# Altium PCB canhbaochayrung.PcbDoc
Units mm, origin at the board's own origin, x right, y up, seen from the top; angles counter-clockwise.
Board outline 38 x 38 mm, 4 copper layers (Top Layer, Internal Plane 1, Internal Plane 2, Bottom Layer); 30 components, 32 nets, 152 pads, 15 vias.
Unrouted connection lines stored in the file: 20.
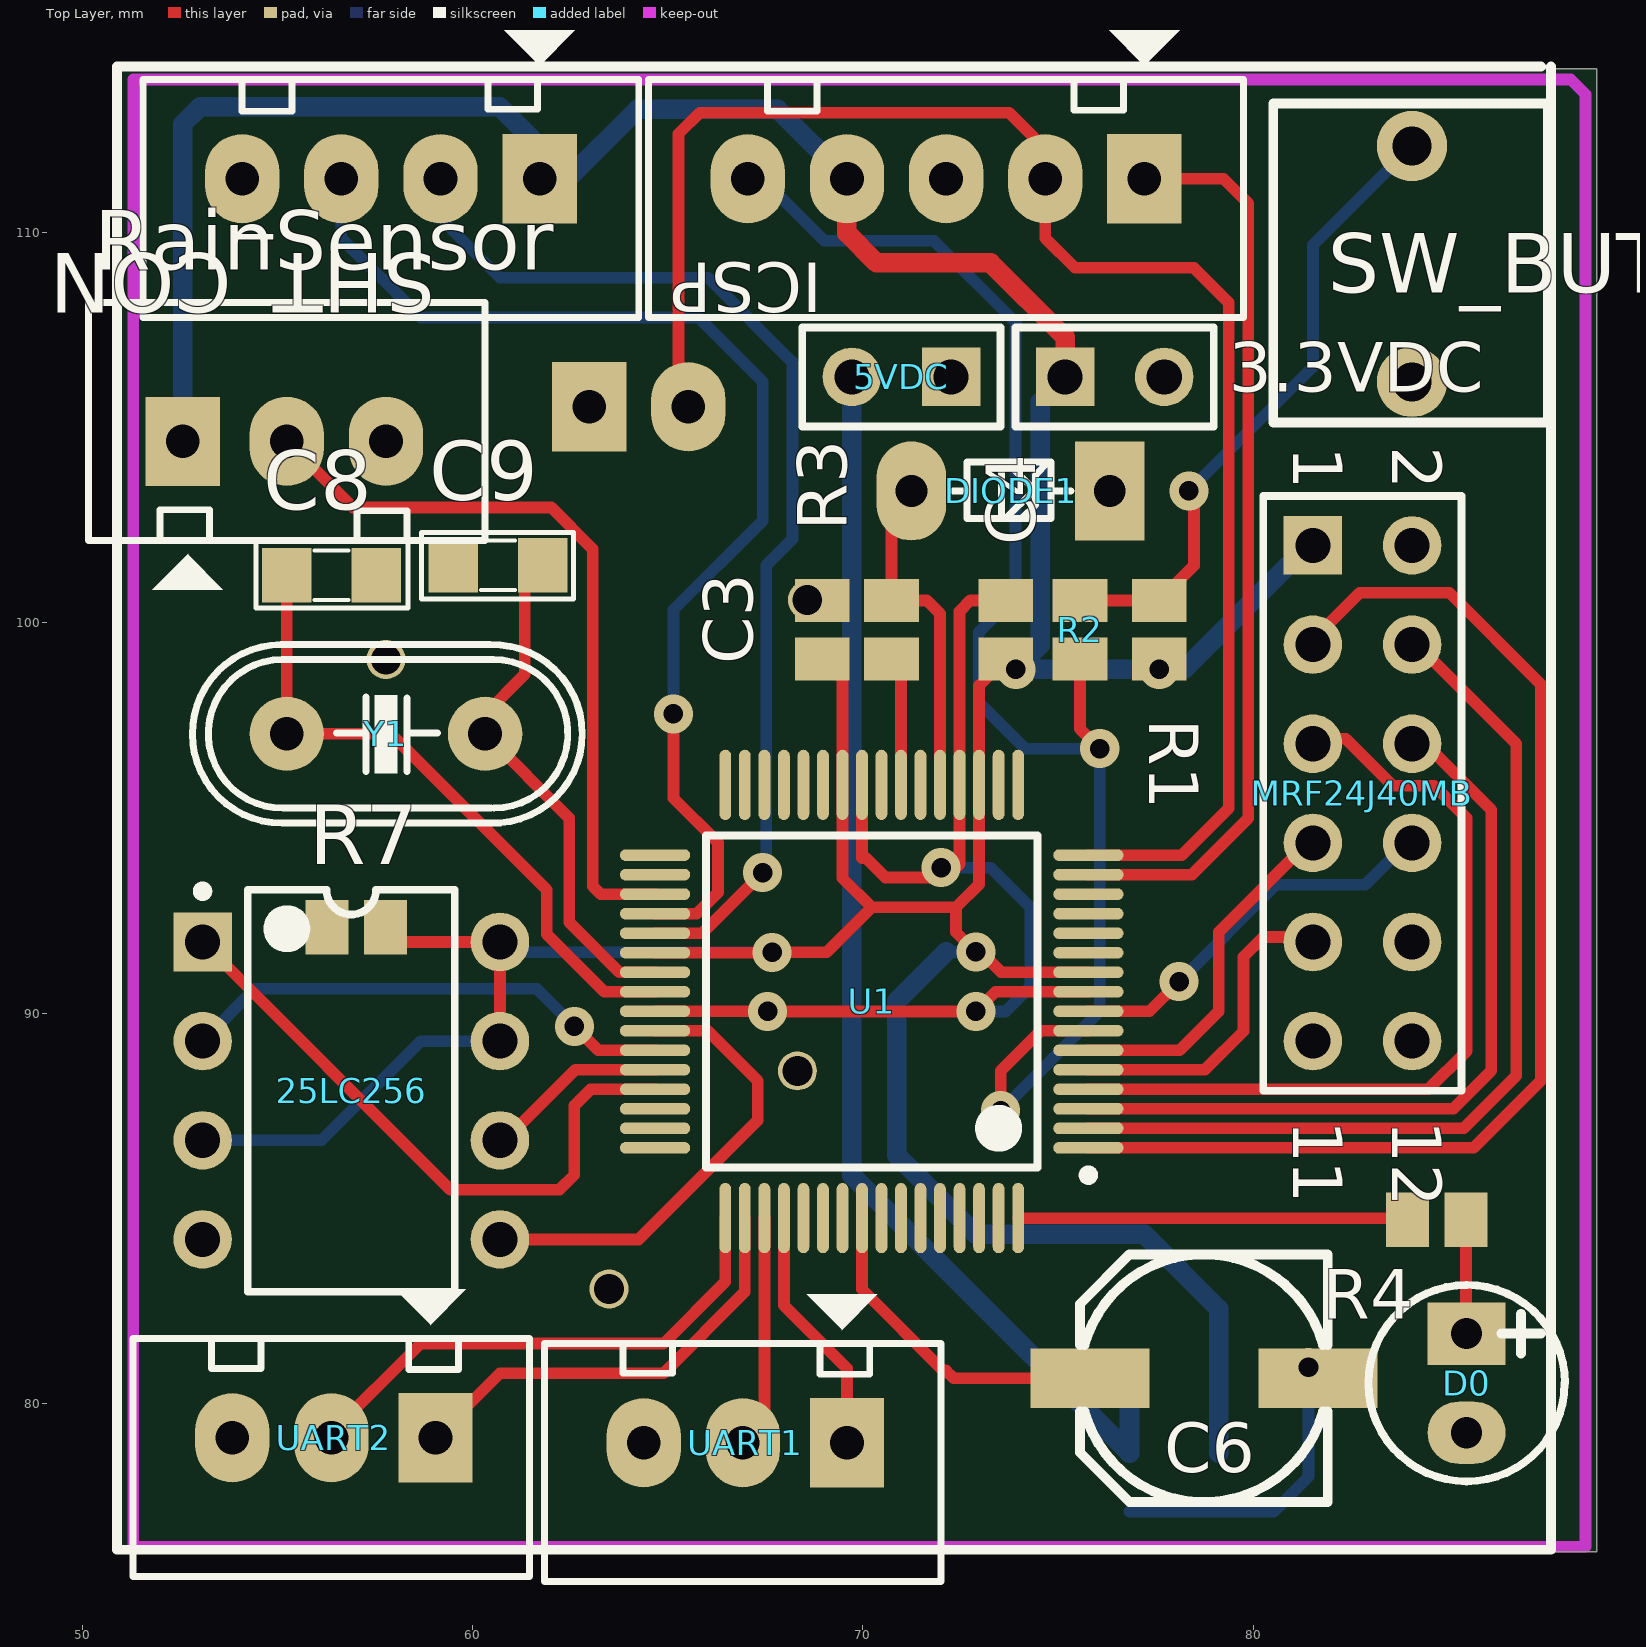
[diagram p0: Top Layer view]
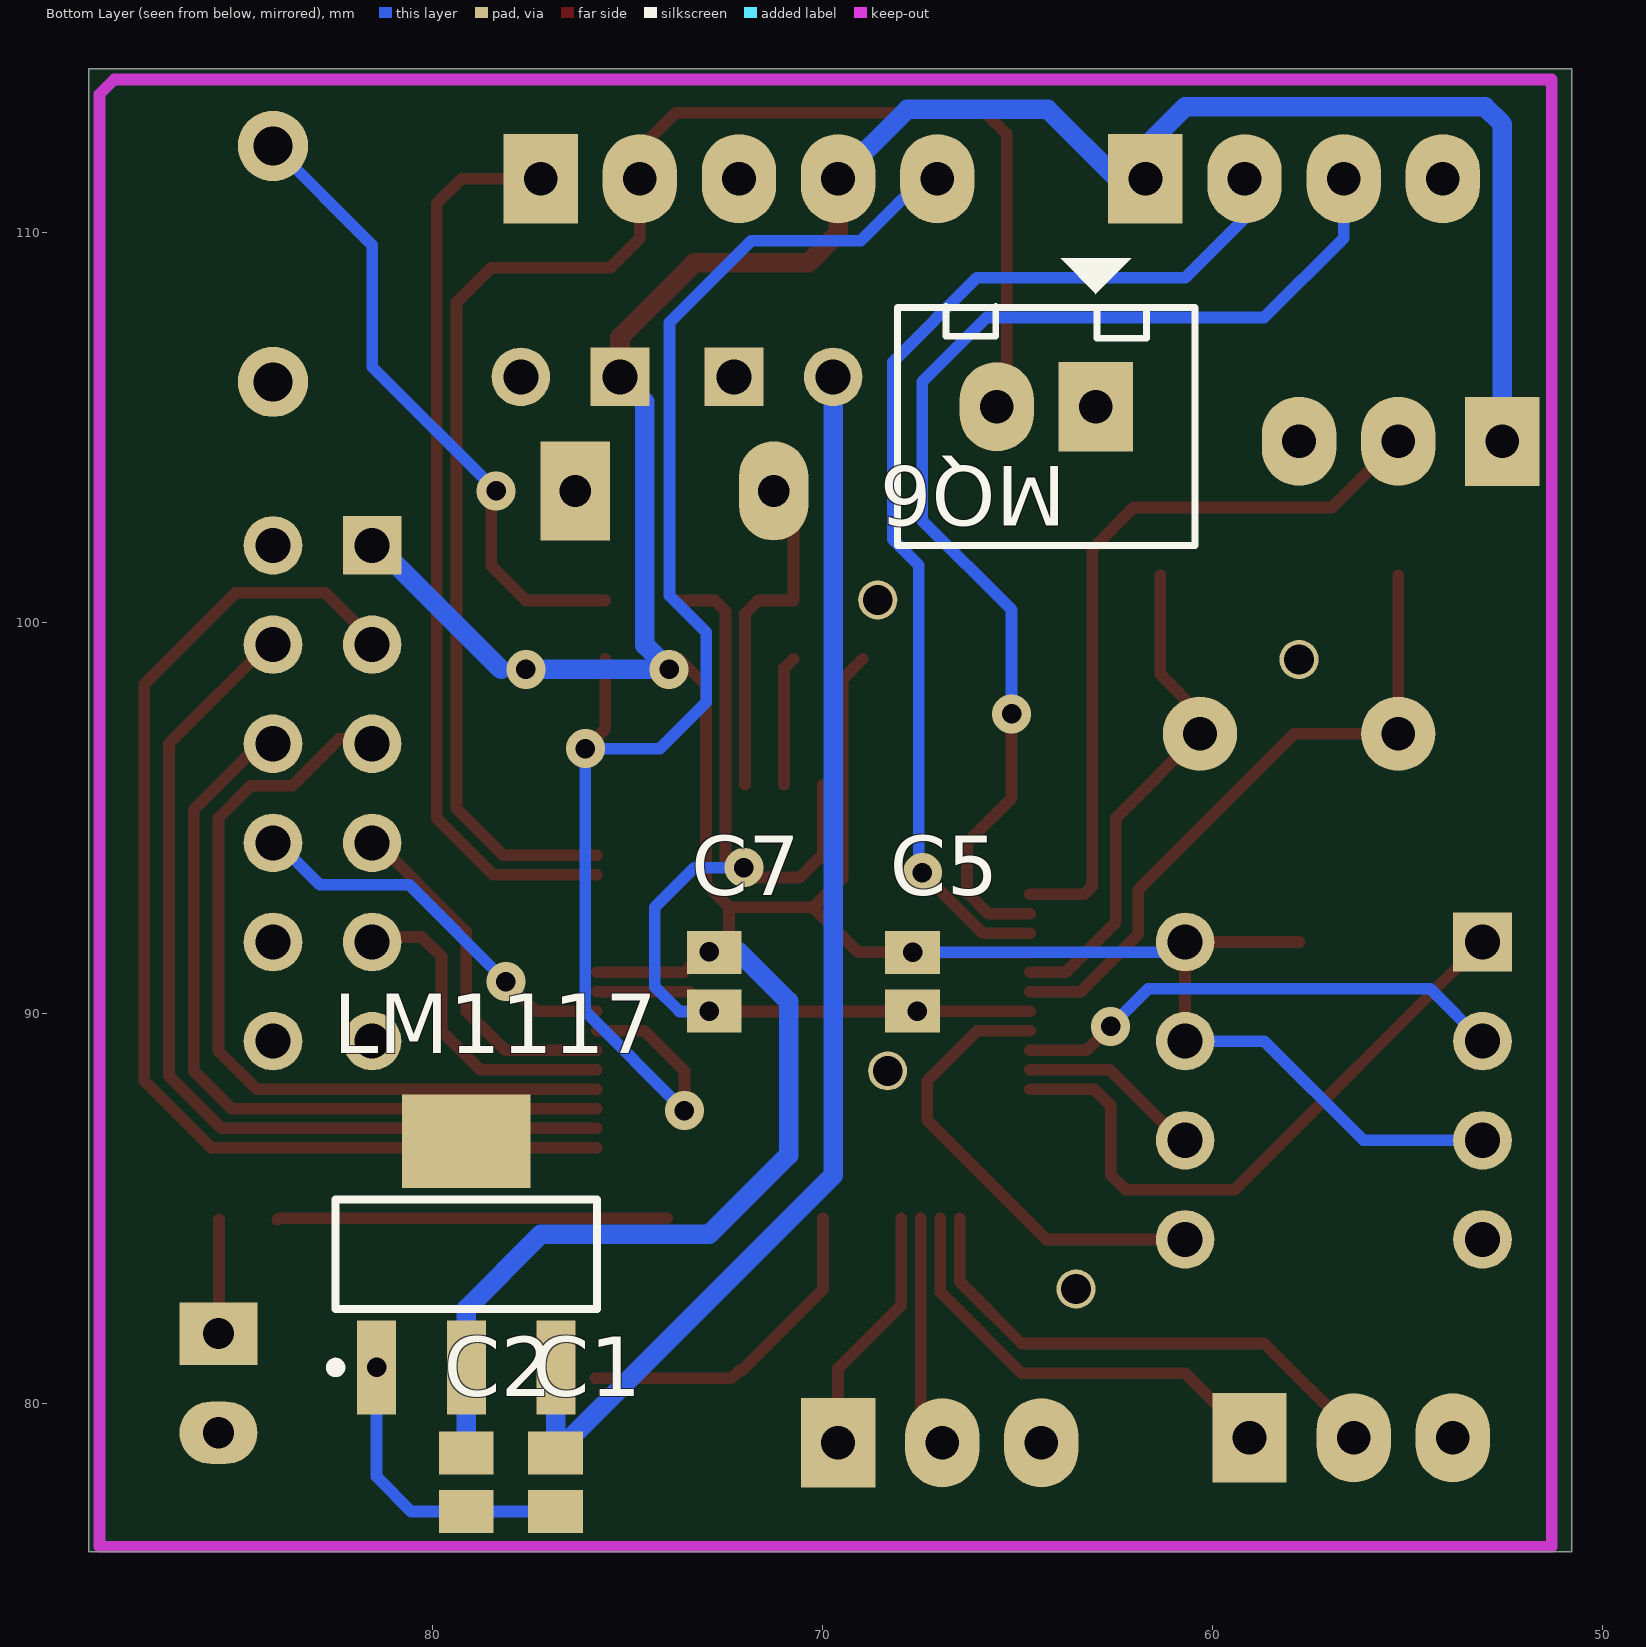
[diagram p1: Bottom Layer view, seen from below]
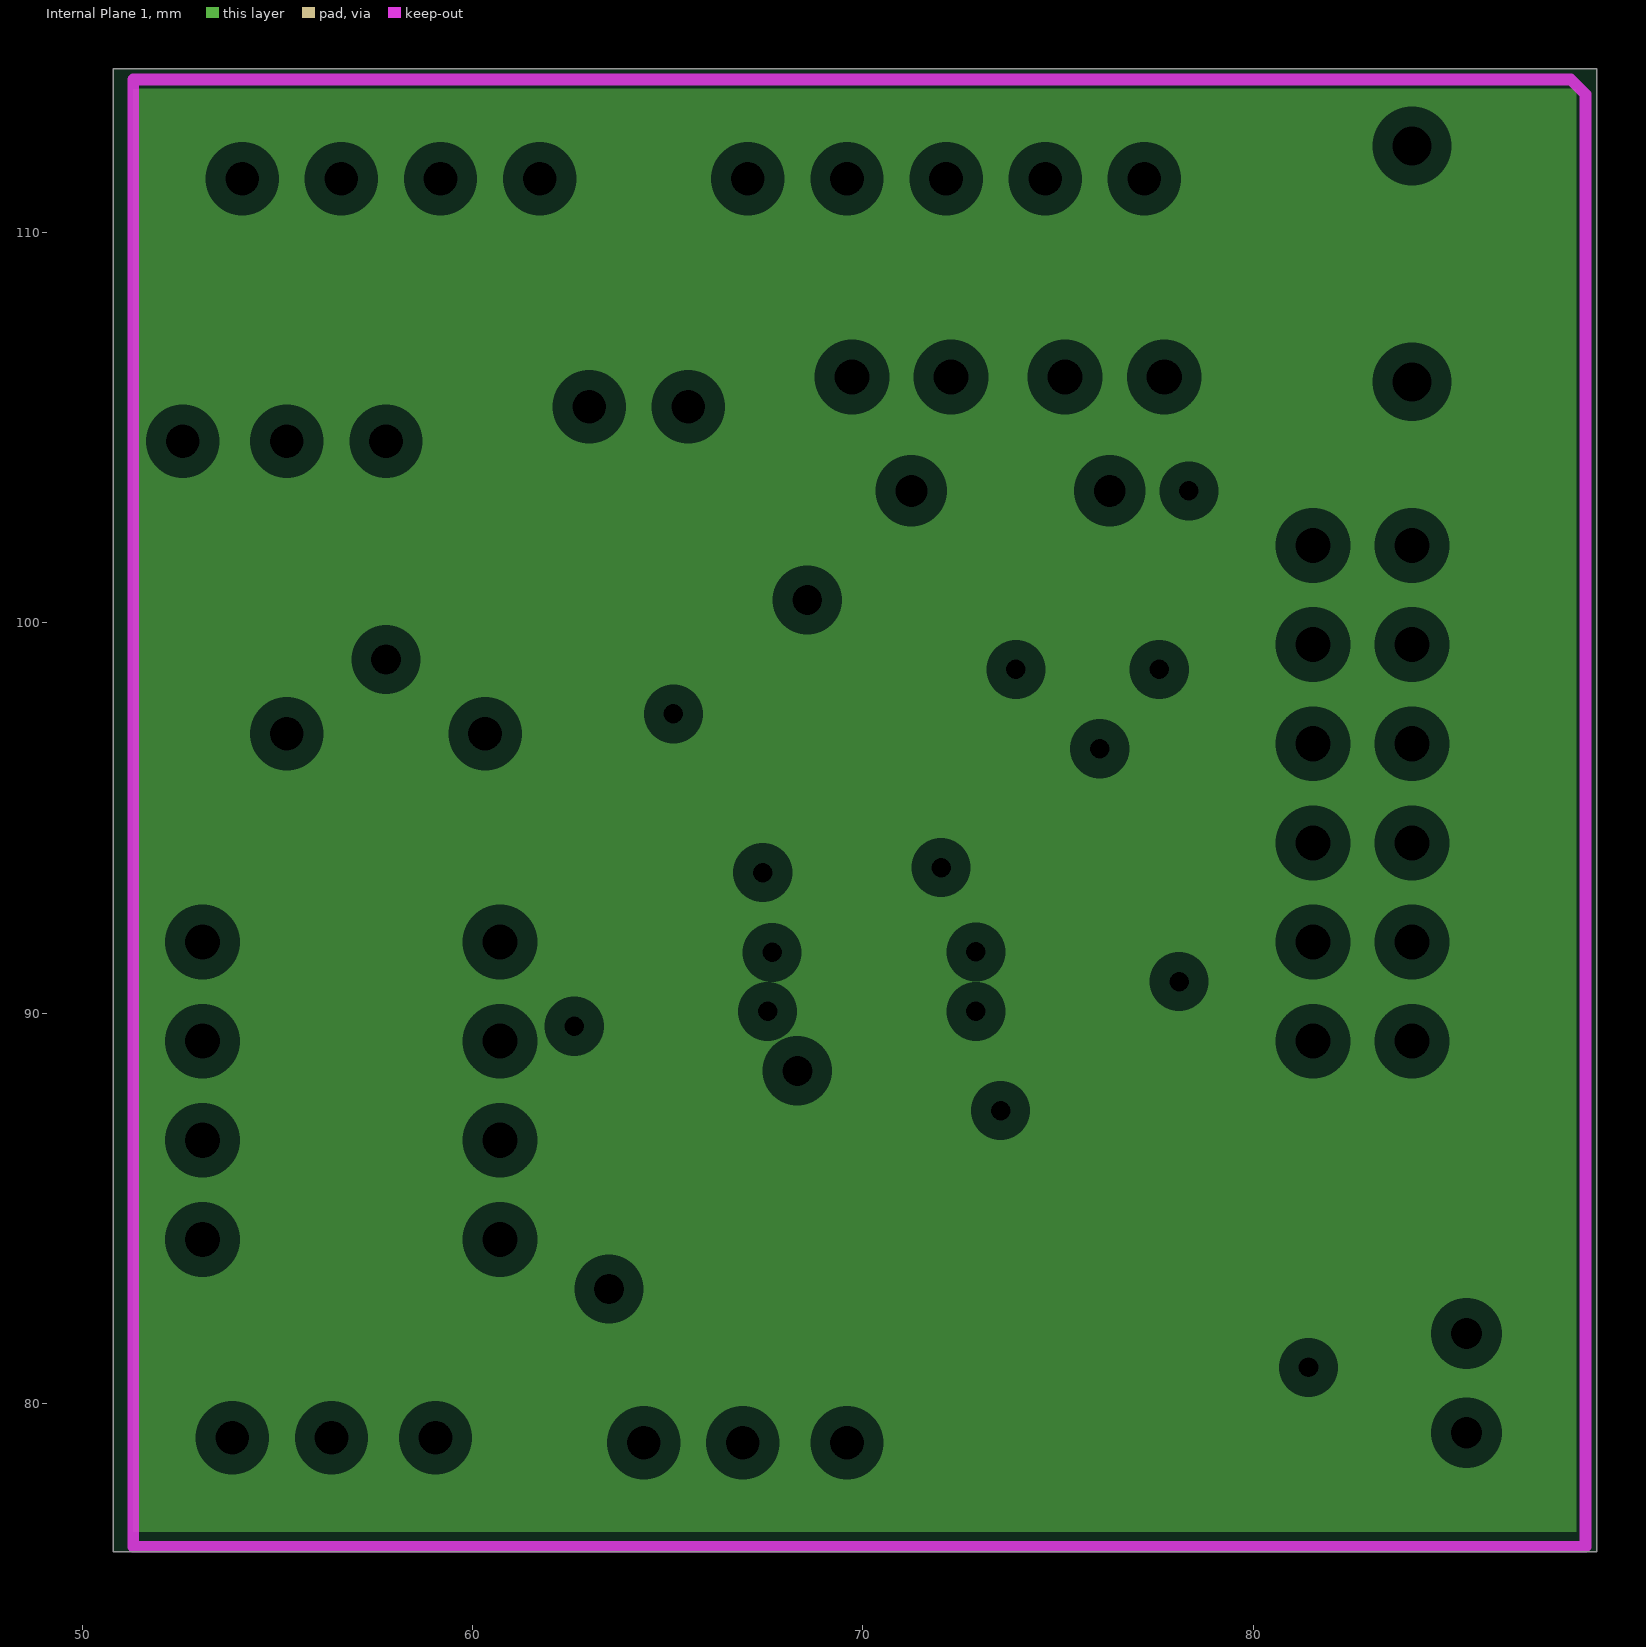
[diagram p2: Internal Plane 1, clearances drawn from the general rule]
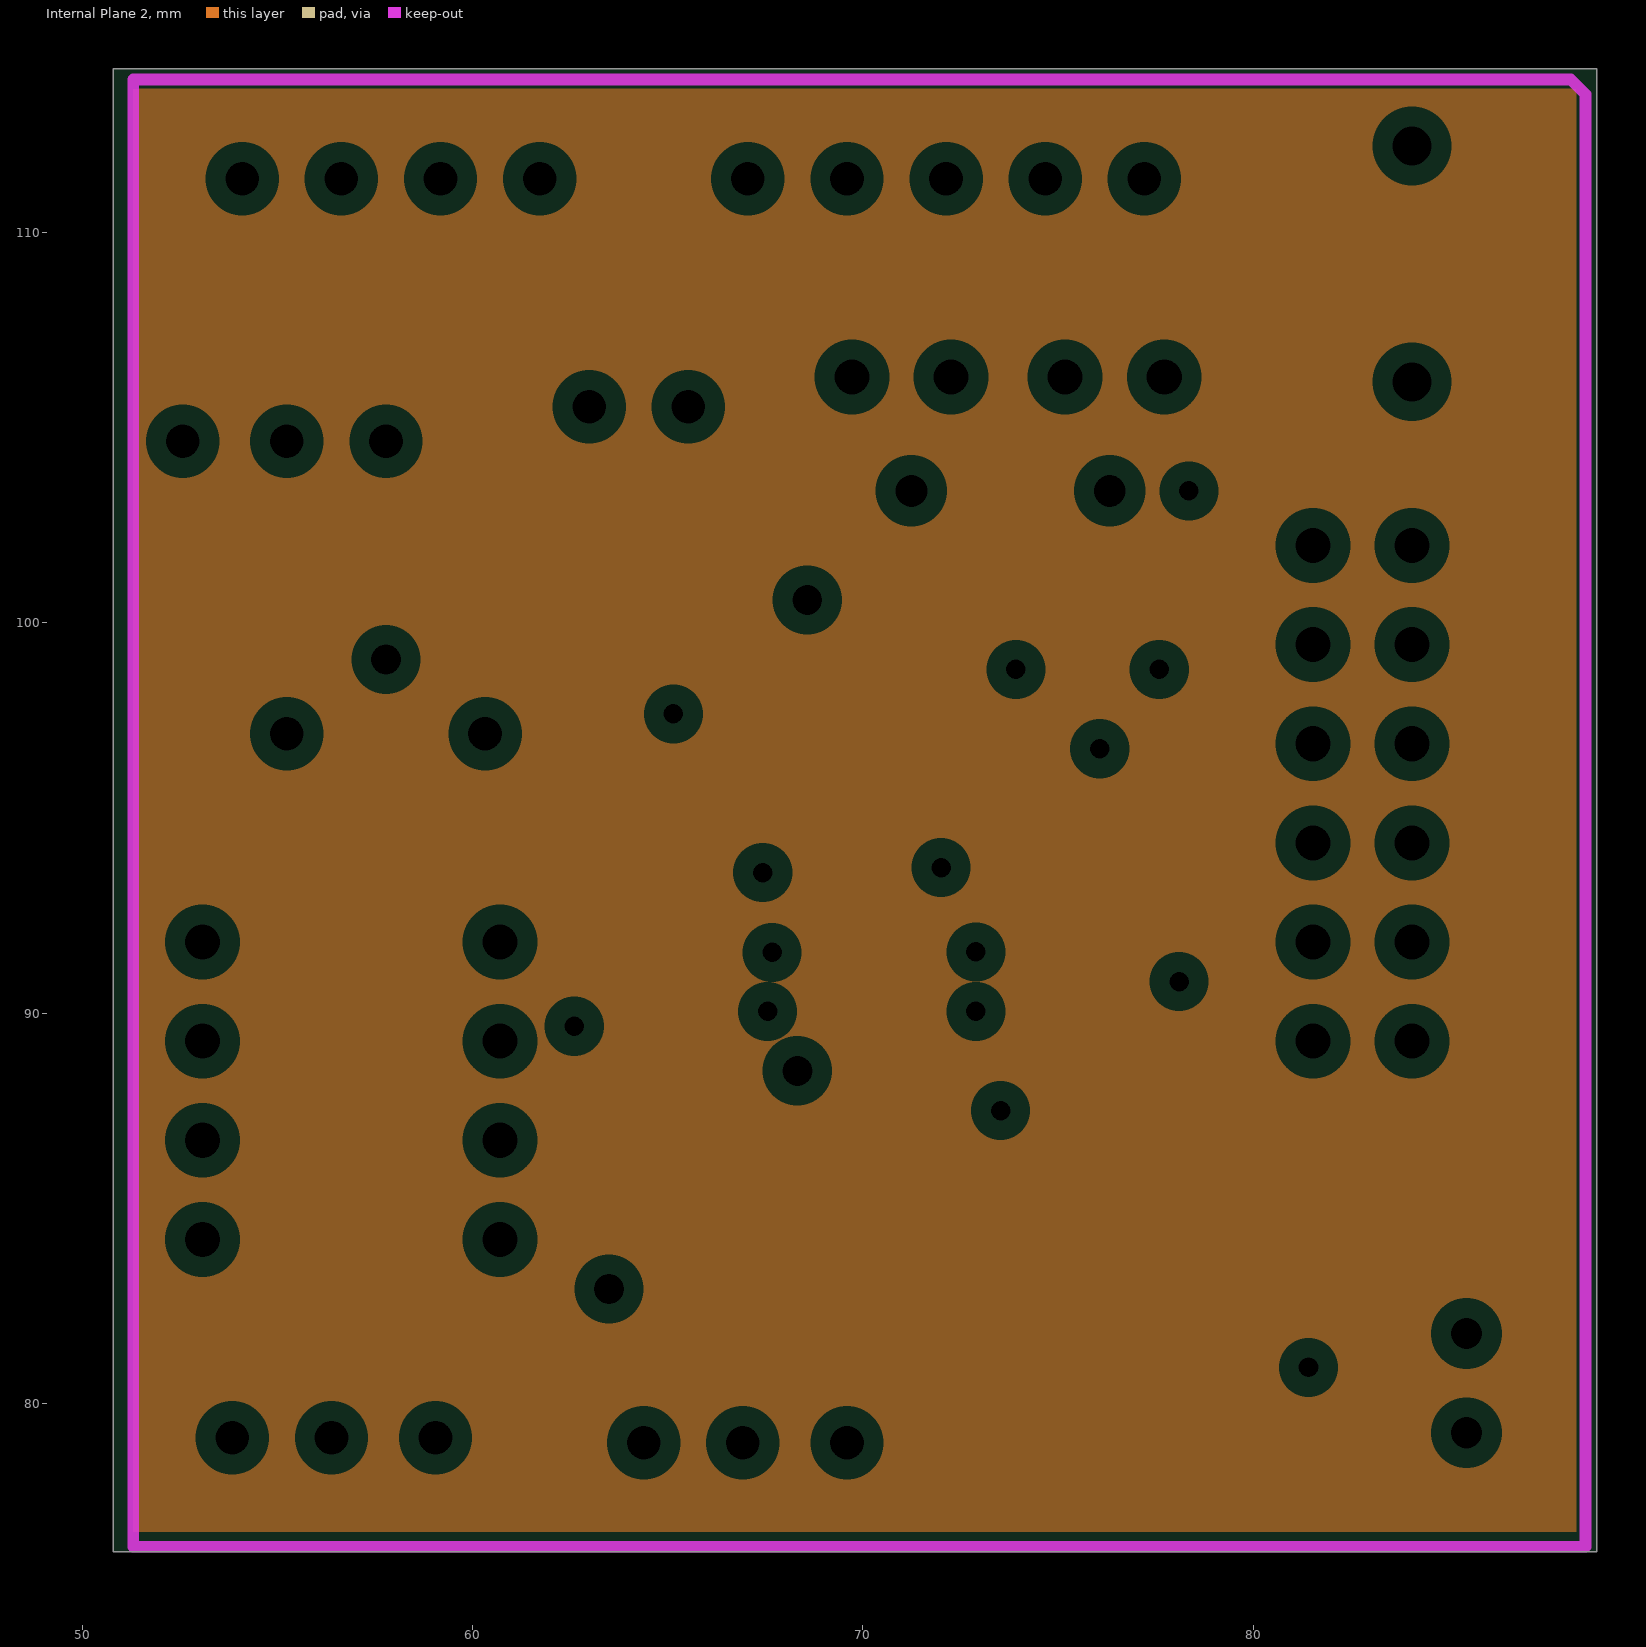
[diagram p3: Internal Plane 2, clearances drawn from the general rule]

## Layer stack, top to bottom
Top Layer: signal copper 0.0356
Dielectric: dielectric 0.32, FR-4, Dk 4.8
Internal Plane 1: plane copper 0.0356
Dielectric: dielectric 0.32, FR-4, Dk 4.8
Internal Plane 2: plane copper 0.0356
Dielectric: dielectric 0.32, FR-4, Dk 4.8
Bottom Layer: signal copper 0.0356

## Board outline
50.8,76.2 88.8,76.2 88.8,114.2 50.8,114.2

## Design rules (kind name [scope] priority, off if disabled: settings)
Clearance [All] p1: gap=0.4
PlaneClearance [All] p1: clearance=0.508
PlaneConnect [All] p1: planeconnectstyle=Relief reliefexpansion=0.508 reliefentries=4 reliefconductorwidth=0.254 reliefairgap=0.254
PolygonConnect [All] p1: connectstyle=Relief reliefconductorwidth=0.254 reliefentries=4 polygonreliefangle="90 Angle"
RoomDefinition Canhbaochayrung [InComponentClass('Canhbaochayrung')] p1: confinementstyle=ConfineIn formatcopy=TRUE lockcomponents=FALSE outline 0,0 50.8,0 50.8,25.4 0,25.4
RoutingVias [All] p1: holewidth=0.6 width=1 viastyle="Through Hole" minholewidth=0.5 minwidth=1 maxholewidth=1 maxwidth=1.27
SilkscreenOverComponentPads [All] p1: minsilkscreentomaskgap=0.254
SolderMaskExpansion [All] p1: expansion=0.102
Width [All] p1: maxlimit=0.3 minlimit=0.3 preferedwidth=0.3
25 further rules are at their usual default settings.

## Components (designator, comment, footprint, x,y, rotation, side; value= is the part's Value field where it differs from the comment)
3.3VDC "Header 2" HDR1X2 75.184,106.299 r0 top
5VDC "Header 2" HDR1X2 72.263,106.299 r180 top
25LC256 "25LC256" DIP-8 56.896,88.011 r0 top
C1 "Cap" C0805 76.835,77.978 r90 bottom
C2 "Cap" C0805 79.121,77.978 r90 bottom
C3 "Cap" C0805 68.961,99.822 r90 top
C4 "Cap" C0805 73.66,99.822 r270 top
C5 "Cap" C0805 67.691,90.805 r270 bottom
C6 "Cap2" "CAP P 6.3x5.4" 78.74,80.645 r180 top
C7 "Cap" C0805 72.771,90.805 r270 bottom
C8 "Cap" SM-0805 56.388,101.219 r180 top
C9 "Cap" SM-0805 60.655,101.473 r0 top
D0 "LED nguon" LED3mm 85.471,80.518 r270 top
DIODE1 "Diode" DZ0.5A 71.247,103.378 r180 top
ICSP "ICSP" CON5 77.216,111.379 r180 top
LM1117 "LM317" SOT223-4N 79.121,83.82 r90 bottom
MQ6 "MQ-6" CON2 62.992,105.537 r0 bottom
MRF24J40MB "Header 6X2" MRF24J40MB_board_mini 85.344,103.251 r180 top
R1 "Res1" C0805 77.597,99.822 r270 top
R2 "res" C0805 75.565,99.822 r270 top
R3 "Res1" C0805 70.739,99.822 r270 top
R4 "Res1" C0805 84.709,84.709 r180 top
R7 "Res Semi" C0805 57.023,92.202 r0 top
RainSensor "PIR module" CON3 52.705,104.648 r0 top
SHT_CON "SHT10 conector" CON4 61.722,111.379 r180 top
SW_BUTTON "SW" SW-2P-S 81.534,106.172 r90 top
U1 "PIC24FJ128GA306" TQFP-PT64_N 70.231,90.297 r180 top
UART1 "UART1" CON3 69.469,78.994 r180 top
UART2 "UART2" CON3 58.928,79.121 r180 top
Y1 "XTAL" XT2 57.785,97.155 r180 top

## Footprints (in the part's own frame and the unit in brackets; to place one, negate y for a bottom-side part, rotate by r counter-clockwise, add the part's x,y. Pads: shape width x height; smd on the part's side, far side on the other; paste and mask are expansions set on the pad)
C0805 [mm] "Chip Capacitor, Body 2.0x1.3mm, IPC High Density"
  rect 1.1x1.4 smd: 1(-0.75,0) 2(0.75,0)
  body extent -1.1,-0.72 1.1,0.72, height 1.4
"CAP P 6.3x5.4" [mil]
  rect 120x60 smd: 1(115,0) 2(-115,0)
  silkscreen extent -125,-125 125,125, body extent -138,-130 138,130, height 213
CON2 [mil] "CON2"
  rect 75x90 hole 34: 1(0,0)
  oval 75x90 hole 34: 2(100,0)
  silkscreen extent -100,-150 200,140, body extent -68,-70 168,107, height 236
CON3 [mil] "CON 3"
  rect 75x90 hole 34: 1(-5,0)
  oval 75x90 hole 34: 2(100,0) 3(200,0)
  silkscreen extent -100,-150 300,140, body extent -95,-90 295,136, height 276
CON4 [mil] "CON4"
  rect 75x90 hole 34: 1(0,0)
  oval 75x90 hole 34: 2(100,0) 3(200,0) 4(300,0)
  silkscreen extent -100,-150 400,140, body extent -90,-90 398,136, height 276
CON5 [mil] "CON5"
  rect 75x90 hole 34: 1(0,0)
  oval 75x90 hole 34: 2(100,0) 3(200,0) 4(300,0) 5(400,0)
  silkscreen extent -100,-150 500,140
DIP-8 [mm] "DIP; 8 Leads; Row Spacing 7.62 mm; Pitch 2.54 mm"
  rect 1.5x1.5 hole 0.9: 1(-3.81,3.81)
  round 1.5 hole 0.9: 2(-3.81,1.27) 3(-3.81,-1.27) 4(-3.81,-3.81) 5(3.81,-3.81) 6(3.81,-1.27) 7(3.81,1.27) 8(3.81,3.81)
  silkscreen extent -3.93,-5.15 2.65,5.23, body extent -3.6,-5.15 3.6,5.15, height 5.08
DZ0.5A [mil] "Diode Zenner, W 80mil, L 300mil"
  oval 70x100 hole 32: 1(0,0)
  rect 70x100 hole 32: 2(-200,0)
  silkscreen extent -161,-29 -42,28
HDR1X2 [mm] "Connector; Header; 2 Position"
  rect 1.5x1.5 hole 0.9: 1(0,0)
  round 1.5 hole 0.9: 2(2.54,0)
  silkscreen extent -1.27,-1.27 3.81,1.27
LED3mm [mm]
  rect 1.6x2 hole 0.8: 1(-1.27,0)
  oval 1.6x2 hole 0.8: 2(1.27,0)
  silkscreen extent -2.52,-2.51 2.51,2.52, body extent -1.99,-1.5 1.99,1.99, height 5.38
MRF24J40MB_board_mini [mm]
  rect 1.5x1.5 hole 0.9: 1(3.81,1.27)
  round 1.5 hole 0.9: 2(1.27,1.27) 3(3.81,3.81) 4(1.27,3.81) 5(3.81,6.35) 6(1.27,6.35) 7(3.81,8.89) 8(1.27,8.89) 9(3.81,11.43) 10(1.27,11.43) 11(3.81,13.97) 12(1.27,13.97)
  silkscreen extent -2.29,-11 34.45,27, body extent 0,0 5.08,15.24, height 7
SM-0805 [mil] "Compoment SMD 80x50mil"
  rect 50x55 smd: 1(-45,0) 2(45,0)
  silkscreen extent -77,-34 76,33, body extent -40,-27 40,23, height 24
SOT223-4N [mm] "SOT223, 4-Leads, Body 6.5x3.5mm, Pitch 2.3mm, Lead Span 7mm, IPC Medium Density"
  rect 2.4x1 smd: 1(-2.9,2.3) 2(-2.9,0) 3(-2.9,-2.3)
  rect 2.4x3.3 smd: 4(2.9,0)
  silkscreen extent -3.02,-3.35 1.4,3.48, body extent -3.39,-3.27 3.5,3.23, height 1.72
SW-2P-S [mm]
  round 1.8 hole 1: 1(0,-2.54) 2(6.045,-2.54)
  silkscreen extent -1.04,-6.02 7.14,1.02
TQFP-PT64_N [mm] "Thin QFP, 64-Leads, Body 10x10mm, Pitch 0.5mm, IPC Medium Density"
  oval 1.8x0.3 smd: 1(-5.55,3.75) 2(-5.55,3.25) 3(-5.55,2.75) 4(-5.55,2.25) 5(-5.55,1.75) 6(-5.55,1.25) 7(-5.55,0.75) 8(-5.55,0.25) 9(-5.55,-0.25) 10(-5.55,-0.75) 11(-5.55,-1.25) 12(-5.55,-1.75) 13(-5.55,-2.25) 14(-5.55,-2.75) 15(-5.55,-3.25) 16(-5.55,-3.75) 33(5.55,-3.75) 34(5.55,-3.25) 35(5.55,-2.75) 36(5.55,-2.25) 37(5.55,-1.75) 38(5.55,-1.25) 39(5.55,-0.75) 40(5.55,-0.25) 41(5.55,0.25) 42(5.55,0.75) 43(5.55,1.25) 44(5.55,1.75) 45(5.55,2.25) 46(5.55,2.75) 47(5.55,3.25) 48(5.55,3.75)
  oval 0.3x1.8 smd: 17(-3.75,-5.55) 18(-3.25,-5.55) 19(-2.75,-5.55) 20(-2.25,-5.55) 21(-1.75,-5.55) 22(-1.25,-5.55) 23(-0.75,-5.55) 24(-0.25,-5.55) 25(0.25,-5.55) 26(0.75,-5.55) 27(1.25,-5.55) 28(1.75,-5.55) 29(2.25,-5.55) 30(2.75,-5.55) 31(3.25,-5.55) 32(3.75,-5.55) 49(3.75,5.55) 50(3.25,5.55) 51(2.75,5.55) 52(2.25,5.55) 53(1.75,5.55) 54(1.25,5.55) 55(0.75,5.55) 56(0.25,5.55) 57(-0.25,5.55) 58(-0.75,5.55) 59(-1.25,5.55) 60(-1.75,5.55) 61(-2.25,5.55) 62(-2.75,5.55) 63(-3.25,5.55) 64(-3.75,5.55)
  silkscreen extent -5.68,-4.25 4.25,4.57, body extent -5,-5 5,5, height 1.2
XT2 [mil] "Footpin for Crystal 2 pin"
  round 75 hole 34: 1(-100,0) 2(100,0)
  silkscreen extent -198,-90 195,90, body extent -233,-93 213,90, height 138

## Part data
3.3VDC 5VDC: "Header, 2-Pin"
C1 C2 C3 C4 C5 C6 C7 C8 C9: "Capacitor"
D0: library part LED0, "Typical INFRARED GaAs LED"
DIODE1: "Default Diode"
ICSP: library part "Header 5", "Header, 5-Pin"
LM1117: "Adj Voltage +1.2 -> +37V"
MQ6: library part "Header 2", "Header, 2-Pin"
MRF24J40MB: "Header, 6-Pin, Dual row"
R1 R3 R4: "Resistor"
R2: library part Res1, "Resistor"
R7: "Semiconductor Resistor"
RainSensor: library part "Header 3H", "Header, 3-Pin, Right Angle"
SHT_CON: library part "Header 4", "Header, 4-Pin"
SW_BUTTON: library part SW2, "Switch button 2 pin"
UART1 UART2: library part Con3, "Connector 3"
Y1: "Crystal Oscillator"

## Free pads (board coordinates)
  round 1 hole 0.762: 0(57.785,99.06) 0(63.5,82.931) 0(68.326,88.519) 0(68.58,100.584)

## Via types
v1: diameter 1, hole 0.5, Top Layer to Bottom Layer, 15 vias

## Nets (pads, with @x,y where several pads share a name; then routed paths per layer and width w, separated by ;. In a path a pad name is that pad's centre, name@x,y a point inside that pad or via, vN(x,y) a via of type N, cw(c..) or ccw(c..) an arc to the next point about the centre after c; other vN are vias at no path point)
3.3VDC: 3.3VDC.1 25LC256.3 25LC256.7 25LC256.8 C2.2 C3.1 C4.2 C5.1 C7.1 ICSP.4 LM1117.2 MRF24J40MB.1 R1.2 R7.2 RainSensor.1 SHT_CON.1 U1.10 U1.19 U1.26 U1.38 | length 122.3
  Top Layer w0.3: R7.2@57.773,91.821 25LC256.8 25LC256.7 ; U1.38 67.671,91.547 v1(67.679,91.555) 69.076,91.555 70.231,92.71 ; C3.1 69.481,98.552 U1.26 69.481,93.46 70.231,92.71 ; v1(73.926,98.806) C4.2 72.981,98.393 U1.19 72.981,93.301 72.39,92.71 ; U1.10 73.545,91.047 73.025,91.567 v1(72.898,91.567) 72.39,92.075 72.39,92.71 ; 70.231,92.71 72.39,92.71
  Top Layer w0.5: ICSP.4 69.596,109.982 70.358,109.22 73.279,109.22 75.184,107.315 3.3VDC.1
  Bottom Layer w0.3: 25LC256.3 56.134,86.741 58.674,89.281 25LC256.7 ; 25LC256.8 60.972,91.555 v1(67.679,91.555) C5.1 ; SHT_CON.1@61.722,112.203 SHT_CON.1 SHT_CON.1@62.449,111.379 ; C7.1@72.136,91.567 v1(72.898,91.567) ; 3.3VDC.1@74.549,105.664 3.3VDC.1 ; v1(77.597,98.806) 78.232,98.806
  Bottom Layer w0.5: RainSensor.1 52.578,112.776 53.021,113.219 60.706,113.219 SHT_CON.1@61.722,112.203 ; SHT_CON.1@62.449,111.379 64.227,113.157 67.818,113.157 ICSP.4 ; C7.1@72.136,91.567 70.866,90.297 70.866,86.36 72.898,84.328 77.216,84.328 79.121,82.423 LM1117.2 C2.2 ; 3.3VDC.1@74.549,105.664 74.549,99.429 v1(73.926,98.806) v1(77.597,98.806) ; 78.232,98.806 MRF24J40MB.1@81.534,102.108
5VDC: 5VDC.2 C1.2 LM1117.3 | length 32.7
  Bottom Layer w0.3: LM1117.3 LM1117.3@76.835,80.906
  Bottom Layer w0.5: 5VDC.2 69.723,85.84 C1.2 LM1117.3@76.835,80.906
AN8: DIODE1.1 R3.1 U1.21 | length 8.8
  Top Layer w0.3: DIODE1.1 70.739,102.87 R3.1 71.64,100.572 71.981,100.231 U1.21
CS1: MRF24J40MB.6 U1.3 | length 20.2
  Top Layer w0.3: U1.3 85.134,87.547 86.106,88.519 86.106,95.21 84.288,97.028 MRF24J40MB.6@84.074,97.028
CS2: 25LC256.1 U1.45 | length 16.3
  Top Layer w0.3: 25LC256.1 59.436,85.471 62.23,85.471 62.611,85.852 62.611,87.63 63.028,88.047 U1.45
GND: 3.3VDC.2 5VDC.1 25LC256.4 C1.1 C2.1 C3.2 C4.1 C5.2 C6.2 C7.2 C8.1 C9.1 D0.2 DIODE1.2 ICSP.3 LM1117.1 MQ6.1 MRF24J40MB.2 pad.0 RainSensor.3 SHT_CON.4 SW_BUTTON.1 U1.9 U1.20 U1.25 U1.41 UART1.3 UART2.3 | length 37.9
  Top Layer w0.3: U1.41 67.56,90.047 v1(67.564,90.043) v1(72.898,90.043) 73.402,90.547 U1.9 ; 69.981,93.976 U1.25 ; 70.081,93.976 70.585,93.472 72.136,93.472 72.481,93.817 U1.20 72.481,100.294 72.759,100.572 C4.1
  Bottom Layer w0.3: v1(72.009,93.726) 73.279,93.726 74.295,92.71 74.295,90.678 73.66,90.043 v1(72.898,90.043) ; C1.1 C2.1 80.53,77.228 81.421,78.119 v1(81.421,80.92)
INT0: RainSensor.2 U1.35 | length 20.2
  Top Layer w0.3: RainSensor.2@55.245,105.537 RainSensor.2 56.938,102.955 62.018,102.955 63.084,101.889 63.084,93.253 63.29,93.047 U1.35
INT1_RP21: MRF24J40MB.5 U1.4 | length 20.8
  Top Layer w0.3: U1.4 84.491,88.047 85.471,89.027 85.471,94.996 84.639,95.828 83.577,95.828 82.377,97.028 MRF24J40MB.5@81.534,97.028
LED: R4.2 U1.64 | length 10
  Top Layer w0.3: U1.64 83.921,84.747 R4.2
NetC6_1: C6.1 U1.56 | length 8.6
  Top Layer w0.3: U1.56 69.981,82.927 72.067,80.841 72.132,80.841 72.328,80.645 C6.1
NetD0_1: D0.1 R4.1 | length 2.9
  Top Layer w0.3: R4.1 85.459,81.8 D0.1
NetR1_1: R1.1 R2.1 SW_BUTTON.2 | length 16.7
  Top Layer w0.3: R2.1 R1.1 78.486,101.461 78.486,103.505 v1(78.359,103.378)
  Bottom Layer w0.3: v1(78.359,103.378) 81.534,106.553 81.534,109.677 SW_BUTTON.2
OSCI: C9.2 U1.39 Y1.1 | length 12.9
  Top Layer w0.3: C9.2@61.341,101.219 61.341,98.679 60.325,97.663 Y1.1 62.484,94.996 62.484,92.329 63.766,91.047 U1.39
OSCO: C8.2 U1.40 Y1.2 | length 16.9
  Top Layer w0.3: C8.2 Y1.2 57.912,97.155 61.906,93.161 61.906,92.018 63.377,90.547 U1.40
PGC: ICSP.1 U1.15 | length 23.4
  Top Layer w0.3: U1.15 78.434,93.547 79.878,94.991 79.878,110.744 79.243,111.379 ICSP.1
PGD: ICSP.2 MQ6.2 U1.16 | length 41.8
  Top Layer w0.3: MQ6.2 65.278,105.791 65.278,112.522 65.821,113.065 73.752,113.065 74.676,112.141 ICSP.2 74.676,109.855 75.438,109.093 78.486,109.093 79.375,108.204 79.375,95.25 78.172,94.047 U1.16
RB10: R3.2 U1.23 | length 3.3
  Top Layer w0.3: R3.2 70.981,98.83 U1.23
RST_MRF: MRF24J40MB.3 U1.1 | length 29.8
  Top Layer w0.3: U1.1 85.658,86.547 87.376,88.265 87.376,98.425 85.033,100.768 82.734,100.768 MRF24J40MB.3@81.534,99.568
SCK1_RP26: MRF24J40MB.9 U1.5 | length 8.3
  Top Layer w0.3: U1.5 78.768,88.547 79.756,89.535 79.756,91.44 80.264,91.948 MRF24J40MB.9@81.534,91.948
SCK2_RP3: 25LC256.6 U1.44 | length 4.7
  Top Layer w0.3: 25LC256.6 60.833,86.741 62.639,88.547 U1.44
SCL1: SHT_CON.2 U1.37 | length 28.4
  Top Layer w0.3: U1.37 65.885,92.047 v1(67.437,93.599)
  Bottom Layer w0.3: SHT_CON.2 59.182,110.363 60.706,108.839 66.04,108.839 68.199,106.68 68.199,102.143 67.529,101.473 67.529,93.691 v1(67.437,93.599)
SDA1: SHT_CON.3 U1.36 | length 30.2
  Top Layer w0.3: U1.36 65.75,92.547 66.294,93.091 66.294,94.361 65.151,95.504 v1(65.151,97.663)
  Bottom Layer w0.3: SHT_CON.3 56.642,109.855 58.674,107.823 65.786,107.823 67.437,106.172 67.437,102.616 65.151,100.33 v1(65.151,97.663)
SDI1_RP27: MRF24J40MB.8 U1.8 | length 10.1
  Top Layer w0.3: U1.8 77.347,90.047 v1(78.105,90.805)
  Bottom Layer w0.3: v1(78.105,90.805) 80.588,93.288 82.874,93.288 MRF24J40MB.8@84.074,94.488
SDI2_RP4: 25LC256.2 U1.43 | length 12.8
  Top Layer w0.3: v1(62.611,89.662) 63.226,89.047 U1.43
  Bottom Layer w0.3: 25LC256.2 54.426,90.621 61.652,90.621 v1(62.611,89.662)
SDO1_RP19: MRF24J40MB.7 U1.6 | length 9.2
  Top Layer w0.3: U1.6 78.125,89.047 79.121,90.043 79.121,92.075 MRF24J40MB.7@81.534,94.488
SDO2_RP2: 25LC256.5 U1.42 | length 12
  Top Layer w0.3: 25LC256.5 64.262,84.201 67.31,87.249 67.31,88.265 66.028,89.547 U1.42
U1RX_RP22: U1.51 UART1.2 | length 6
  Top Layer w0.3: UART1.2 67.481,79.546 U1.51
U1TX_RP25: U1.52 UART1.1 | length 6.4
  Top Layer w0.3: U1.52 67.981,82.514 69.596,80.899 UART1.1
U2RX_RP24: U1.49 UART2.2 | length 13.5
  Top Layer w0.3: UART2.2 56.388,79.248 58.674,81.534 64.897,81.534 66.481,83.118 U1.49
U2TX_RP23: U1.50 UART2.1 | length 11.4
  Top Layer w0.3: UART2.1 60.706,80.772 64.897,80.772 66.981,82.856 U1.50
VPP: ICSP.5 R2.2 U1.7 | length 38.6
  Top Layer w0.3: v1(73.533,87.503) 73.533,88.519 74.561,89.547 U1.7 ; R2.2 75.565,97.282 v1(76.073,96.774)
  Bottom Layer w0.3: ICSP.5 67.422,111.379 69.015,109.786 71.824,109.786 73.914,107.696 73.914,100.694 72.976,99.756 72.976,97.966 74.168,96.774 v1(76.073,96.774) 76.073,90.043 v1(73.533,87.503)
WAKE: MRF24J40MB.4 U1.2 | length 23.8
  Top Layer w0.3: U1.2 85.396,87.047 86.741,88.392 86.741,96.901 MRF24J40MB.4@84.074,99.568
pads on no net: LM1117.4 MRF24J40MB.10 MRF24J40MB.11 MRF24J40MB.12 R7.1 U1.11 U1.12 U1.13 U1.14 U1.17 U1.18 U1.22 U1.24 U1.27 U1.28 U1.29 U1.30 U1.31 U1.32 U1.33 U1.34 U1.46 U1.47 U1.48 U1.53 U1.54 U1.55 U1.57 U1.58 U1.59 U1.60 U1.61 U1.62 U1.63
copper on no net: | length 2
  Top Layer w0.3: 52.959,91.567 53.594,92.202 ; 53.086,91.821 53.467,92.202 53.086,91.821

## Polygon pours and split planes (outlines as drawn)
no net on Internal Plane 1 (split plane): 88.29,76.71 51.31,76.71 51.31,113.69 88.29,113.69
no net on Internal Plane 2 (split plane): 88.29,76.71 51.31,76.71 51.31,113.69 88.29,113.69

## Keep-outs
Keep-Out Layer:
  lines w0.3: 51.308,76.327 88.519,76.327 88.519,113.538 88.138,113.919 51.308,113.919 51.308,76.327

## Silkscreen, mask and mechanical layers (free items; w line width, h text height)
Drill Drawing:
  text ".LEGEND" at 93.88,81.28 h1.52
  text "Drill Drawing." at 93.88,78.74 h1.52

## Dimensions
51.308,76.327 to 88.519,76.327 on Mechanical 1
51.308,76.327 to 51.308,113.919 on Mechanical 1

## Text inside footprints (layer, text, board x,y; h text height)
MRF24J40MB: Top Overlay "12" at 83.566,87.249 h1.27 r270; Top Overlay "1" at 81.026,86.233 h1.27 r270; Top Overlay "1" at 81.026,87.249 h1.27 r270; Top Overlay "1" at 81.026,104.521 h1.27 r270; Top Overlay "2" at 83.566,104.521 h1.27 r270